# Altium PCB PCB1.PcbDoc
Units mil, origin at the board's own origin, x right, y up, seen from the top; angles counter-clockwise.
Board outline 4295 x 2660 mil, 4 copper layers (Top Layer, GND, VCC, Bottom Layer), stack 21.709 mil thick; 22 components, 16 nets, 77 pads, 13 vias.
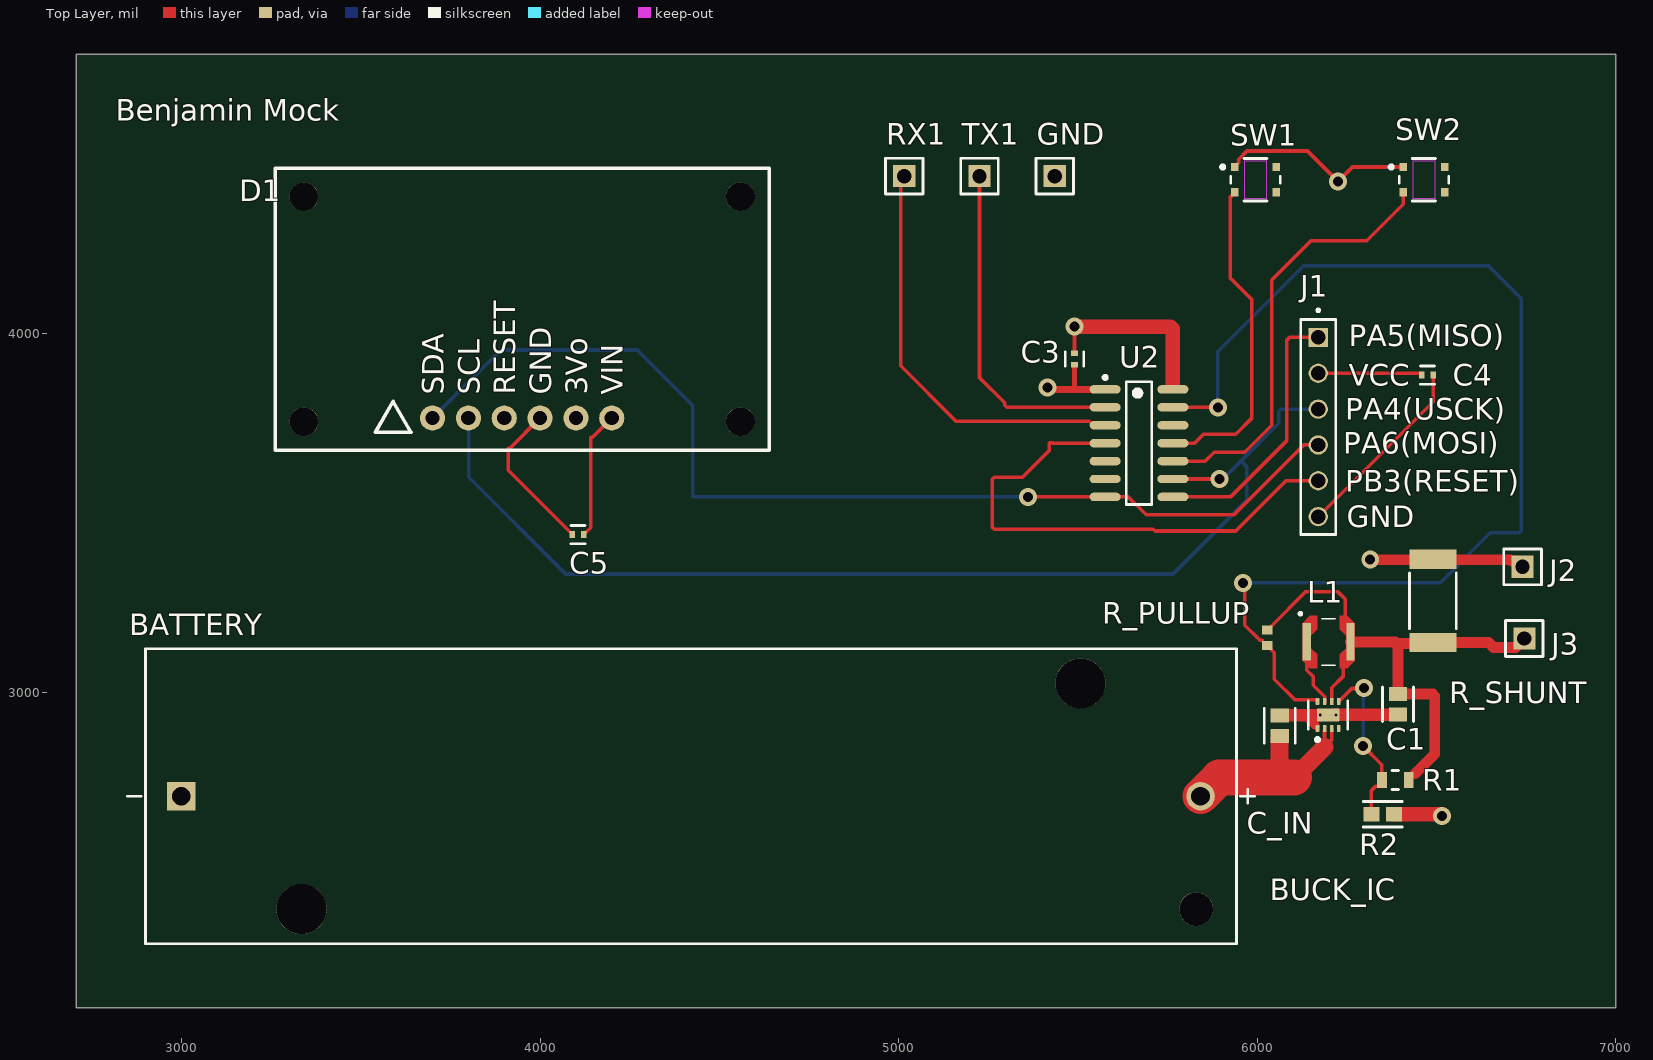
[diagram p0: Top Layer view]
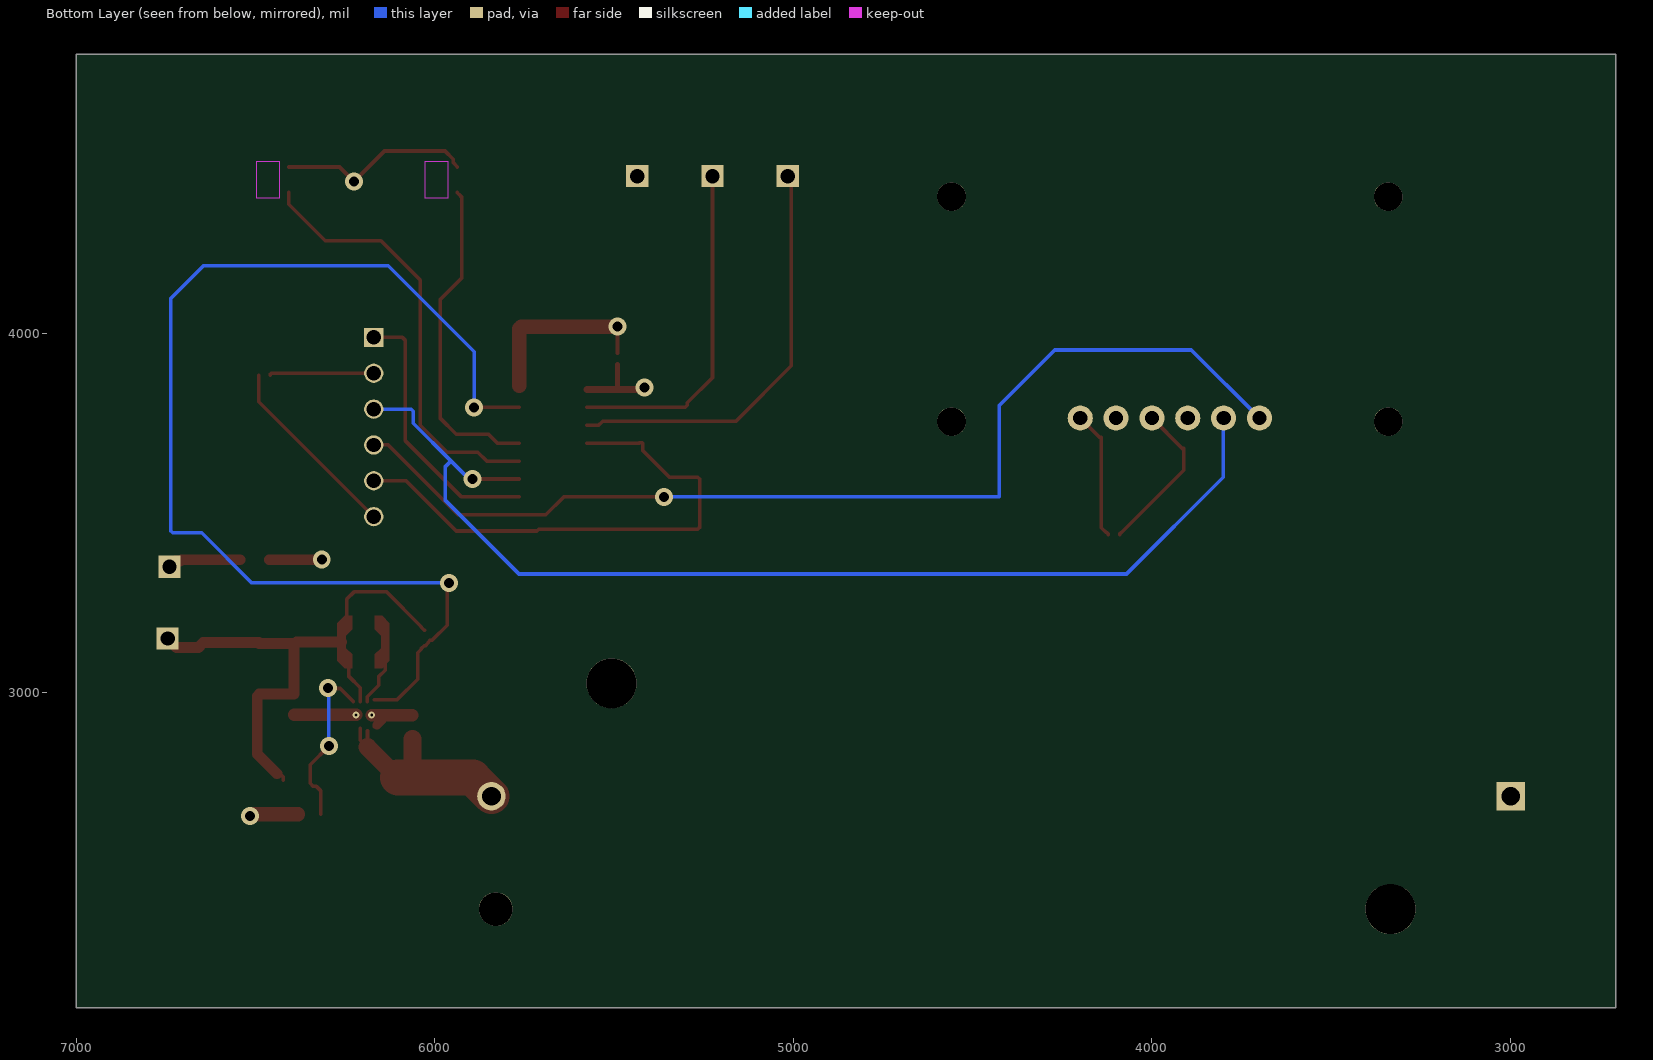
[diagram p1: Bottom Layer view, seen from below]
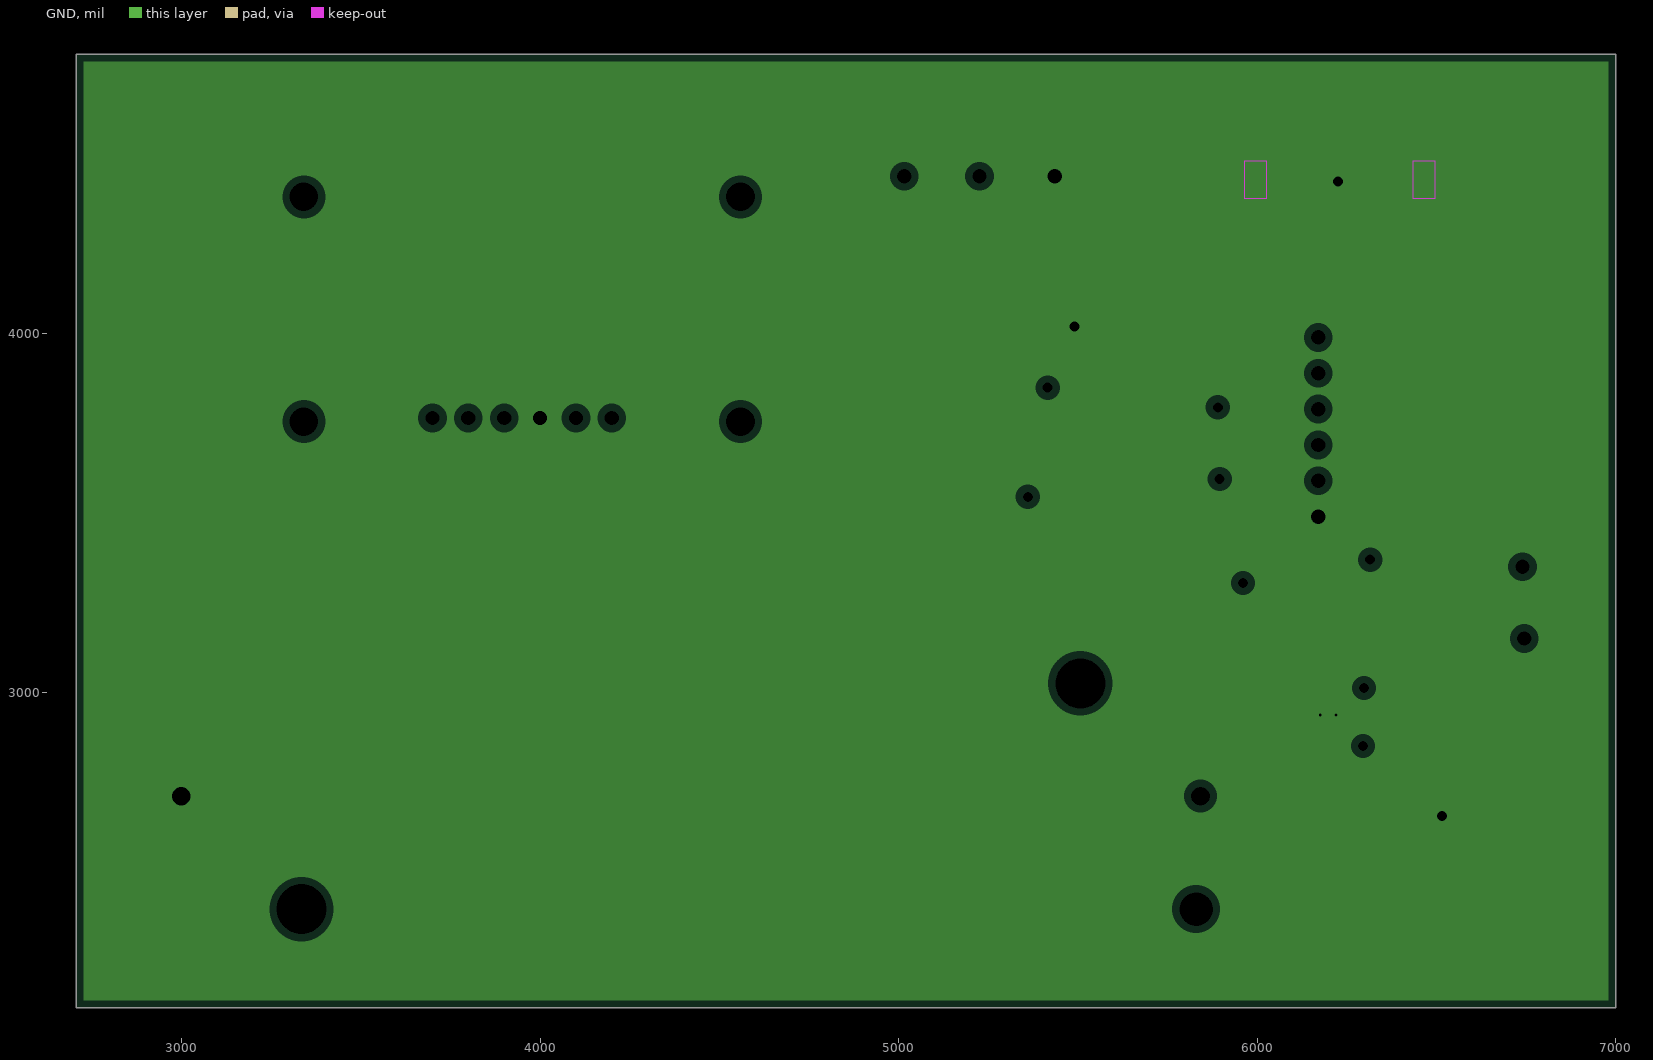
[diagram p2: GND, clearances drawn from the general rule]
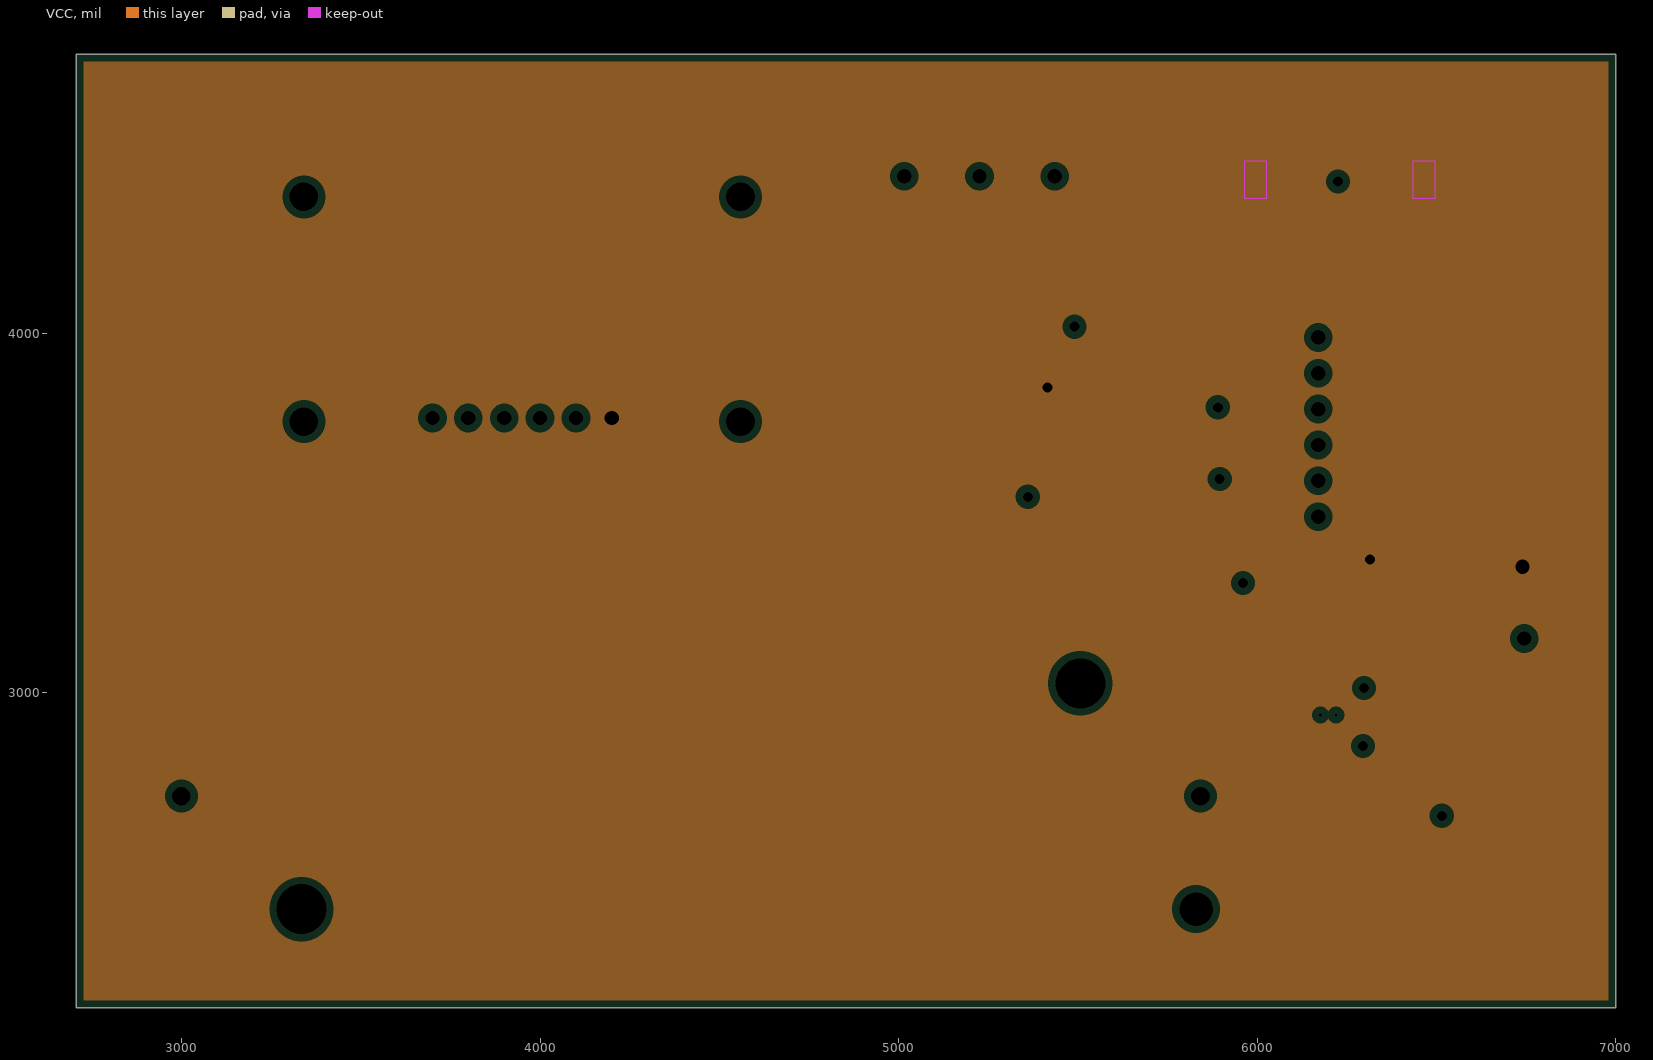
[diagram p3: VCC, clearances drawn from the general rule]
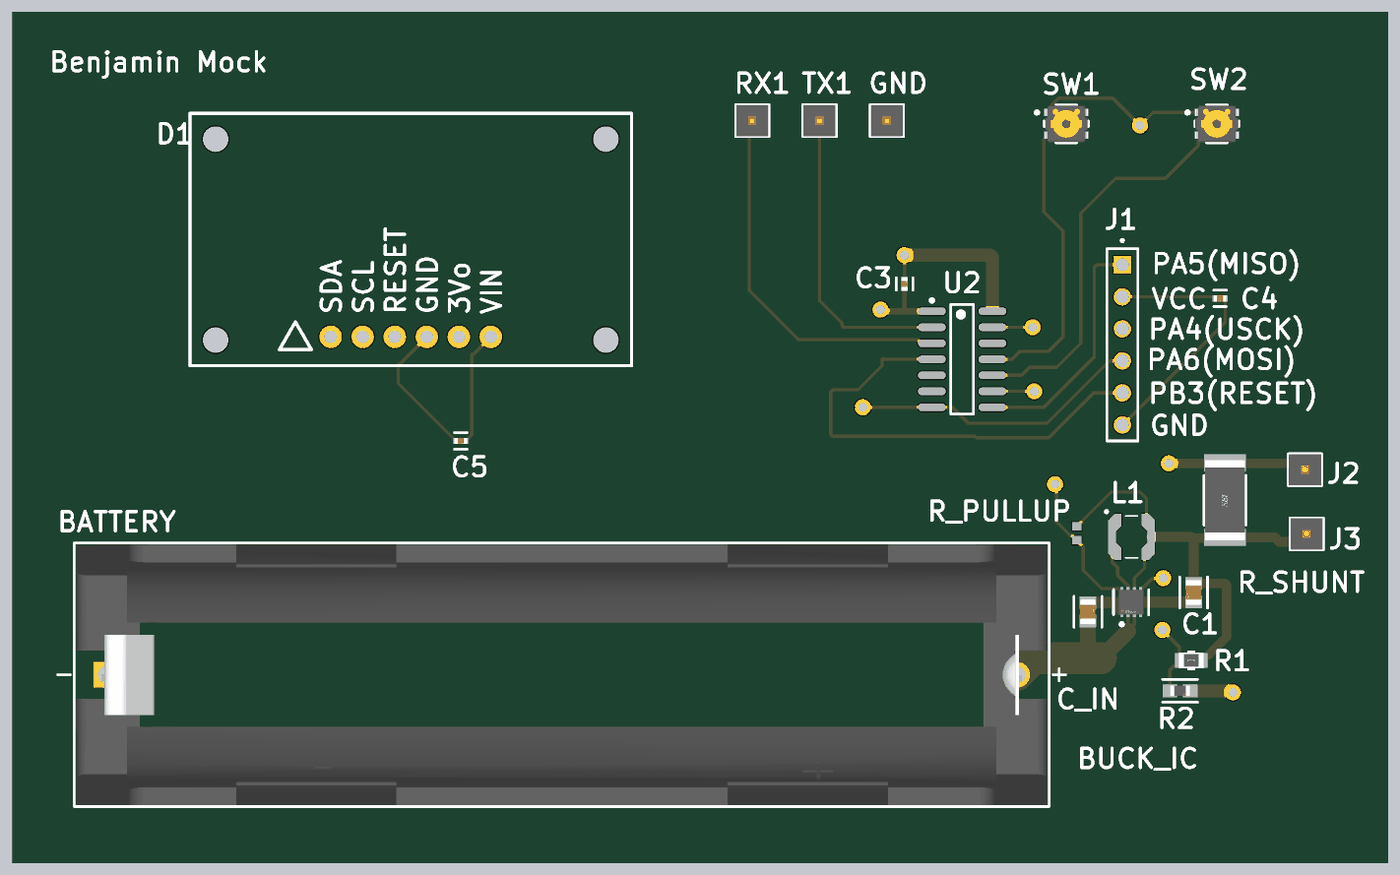
[diagram p4: 3D render of the assembled board from above, using the file's embedded part models]

## Layer stack, top to bottom
Top Solder: solder mask 0.4, Solder Resist, Dk 3.5
Top Layer: signal copper 1.4
Dielectric 2: prepreg 2.8, PP-006, Dk 4.1
GND: plane copper 0.3543, net GND
Dielectric 1: dielectric 12.6, FR-4, Dk 4.8
VCC: plane copper 0.3543, net VCC
Dielectric 3: prepreg 2.8, PP-006, Dk 4.1
Bottom Layer: signal copper 1.4
Bottom Solder: solder mask 0.4, Solder Resist, Dk 3.5

## Board outline
2705,2120 7000,2120 7000,4780 2705,4780

## Design rules (kind name [scope] priority, off if disabled: settings)
Clearance [All] p1: gap=10 ignorepadtopadclearanceinfootprint=TRUE except(8: Arc-Arc Arc-Track Arc-SMDPad Track-Track Track-SMDPad)
HoleSize [All] p1: absolutevalues=TRUE maxlimit=200 minlimit=1 maxpercent=80.000 minpercent=20.000
MinimumSolderMaskSliver [All] p1: minsoldermaskwidth=8
PlaneClearance [All] p1: clearance=20
PlaneConnect [All] p1: planeconnectstyle=Relief reliefexpansion=20 reliefentries=4 reliefconductorwidth=10 reliefairgap=10
PolygonConnect [All] p1: connectstyle=Relief reliefconductorwidth=10 reliefentries=4 polygonreliefangle="90 Angle" airgapwidth=10
RoutingVias [All] p1: holewidth=28 width=50 viastyle="Through Hole" minholewidth=28 minwidth=50 maxholewidth=28 maxwidth=50
SilkToSilkClearance [All] p1: silktosilkclearance=7.5
SilkToSolderMaskClearance [IsPad] p1: minsilkscreentomaskgap=7.5 clearancetoexposedcopper=TRUE
SolderMaskExpansion [All] p1: expansion=4 istentingtop=FALSE
SupplyNets "Schematic Supply Nets" [InNet('GND')] p1: voltage=0.000
Width [All] p1: maxlimit=100 minlimit=10 preferedwidth=10 bottomlayer_maxwidth=10 minimp=50.000000 maximp=50.000000 favimp=50.000000
24 further rules are at their usual default settings.

## Classes and differential pairs
component class U_BuckConverter: BATTERY BUCK_IC C1 C_IN L1 R1 R2 R_PULLUP
component class main: C3 C4 C5 D1 GND J1 J2 J3 R_SHUNT RX1 SW1 SW2 TX1 U2

## Components (designator, comment, footprint, x,y, rotation, side; value= is the part's Value field where it differs from the comment)
BATTERY "1043P" FP-1043P-MFG 4420,2710 r0 top
BUCK_IC "TPS62125DSGR" FP-DSG0008A-MFG 6197.5,2936.77 r90 top
C1 "GRM21BR61E106MA73K" FP-GRM21B-0_15-IPC_C 6392.5,2966.77 r270 top
C3 "GRM155C71H104KE19D" FP-GRM155-0_05-MFG 5490,3930 r90 top
C4 "GRM155C71H104KE19D" FP-GRM155-0_05-MFG 6475,3885 r0 top
C5 "GRM155C71H104KE19D" FP-GRM155-0_05-MFG 4105,3440 r0 top
C_IN "GRM21BR61E106MA73K" FP-GRM21B-0_15-IPC_C 6062.5,2906.77 r90 top
D1 "OLED_0.91in_6PIN" PCBComponent_1 3260,3675 r0 top
GND "HTSW-101-07-L-S" FP-HTSW-101-07-L-S-MFG 5435,4440 r0 top
J1 "TLW-106-05-T-S" SAMTEC_TLW-106-05-T-S 6170,3990 r90 top
J2 "HTSW-101-07-L-S" FP-HTSW-101-07-L-S-MFG 6740,3350 r0 top
J3 "HTSW-101-07-L-S" FP-HTSW-101-07-L-S-MFG 6745,3150 r0 top
L1 "LPS3314-222MRB" IND_LPS3314-222MRB 6198.99,3140.42 r0 top
R1 "MCR10EZPF1804" FP-MCR10-MFG 6385,2755 r0 top
R2 "TFCR0603-10W-E-5763BT-1K" FP-TFCR0603-IPC_A 6350,2660 r180 top
R_PULLUP "8K2 5% 0402(1005)" RESC0402(1005)_M 6027.5,3151.77 r90 top value="8200.00 Ohm"
R_SHUNT "CSRN2512FT50L0" FP-CSRN2512-IPC_B 6490,3255 r90 top
RX1 "HTSW-101-07-L-S" FP-HTSW-101-07-L-S-MFG 5015,4440 r0 top
SW1 "EVP-AYG0BA" FP-EVP-AYG0BA-MFG 5995,4430 r0 top
SW2 "EVP-AYG0BA" FP-EVP-AYG0BA-MFG 6465,4430 r0 top
TX1 "HTSW-101-07-L-S" FP-HTSW-101-07-L-S-MFG 5225,4440 r0 top
U2 "ATtiny84-20SSU" 14S1_N 5670,3695 r0 top

## Footprints (in the part's own frame and the unit in brackets; to place one, negate y for a bottom-side part, rotate by r counter-clockwise, add the part's x,y. Pads: shape width x height; smd on the part's side, far side on the other; paste and mask are expansions set on the pad)
14S1_N [mm] "SOIC, 14-Leads, Body 8.7x3.9mm, Pitch 1.27mm, IPC Medium Density"
  oval 2.2x0.6 smd: 1(-2.4,3.81) 2(-2.4,2.54) 3(-2.4,1.27) 4(-2.4,0) 5(-2.4,-1.27) 6(-2.4,-2.54) 7(-2.4,-3.81) 8(2.4,-3.81) 9(2.4,-2.54) 10(2.4,-1.27) 11(2.4,0) 12(2.4,1.27) 13(2.4,2.54) 14(2.4,3.81)
  silkscreen extent -2.52,-4.35 0.9,4.78, body extent -1.99,-4.37 1.99,4.37, height 1.75
FP-1043P-MFG [mm]
  rect 2.02x2.02 hole 1.32 paste-2539.97 mask+0: 1(-36.11,0)
  round 2.02 hole 1.32 paste-2539.97 mask+0: 2(36.11,0)
  round 3.55 hole 3.55 unplated paste-2539.97 mask+0: ""(-27.6,-8) ""(27.6,8)
  round 2.39 hole 2.39 unplated paste-2539.97 mask+0: ""(35.8,-8)
  silkscreen extent -39.95,-10.45 39.95,10.45, body extent -38.75,-10.55 38.75,10.55, height 0.25
FP-CSRN2512-IPC_B [mil]
  rect 53.33x130.24 smd paste+0 mask+0: 1(-116.17,0) 2(116.17,0)
  silkscreen extent -78,-65 78,65, body extent -153,-75 153,75, height 10
FP-DSG0008A-MFG [mm]
  rrect40% 0.5x0.25 smd paste+0 mask+0: 1(-0.95,0.75) 2(-0.95,0.25) 3(-0.95,-0.25) 4(-0.95,-0.75) 5(0.95,-0.75) 6(0.95,-0.25) 7(0.95,0.25) 8(0.95,0.75)
  rrect11% 0.9x1.6 smd paste-1000 mask+0: 9(0,0)
  silkscreen extent -1.87,-1.39 1,1.4, body extent -1.3,-1.15 1.3,1.15, height 0.25
FP-EVP-AYG0BA-MFG [mm]
  rect 0.55x0.6 smd paste+0 mask+0: A(-1.475,0.9) A'(1.475,0.9) B(-1.475,-0.9) B'(1.475,-0.9)
  Keep-Out Layer region: -0.8,-1.3 0.8,-1.3 0.8,1.3 -0.8,1.3
  silkscreen extent -2.45,-1.5 1.75,1.5, body extent -1.85,-1.6 1.85,1.6, height 0.25
FP-GRM21B-0_15-IPC_C [mil]
  rect 39.6x51.5 smd paste+0 mask+0: 1(-28.59,0) 2(28.59,0)
  silkscreen extent -48,-43 48,43, body extent -52,-31 52,31, height 10
FP-GRM155-0_05-MFG [mm]
  rect 0.4x0.5 smd paste+0 mask+0: 1(-0.4,0) 2(0.4,0)
  silkscreen extent -0.5,-0.65 0.5,0.65, body extent -0.7,-0.38 0.7,0.38, height 0.25
FP-HTSW-101-07-L-S-MFG [mm]
  rect 1.57x1.57 hole 1.02 paste-2539.97 mask+0: 1(0,0)
  silkscreen extent -1.33,-1.27 1.33,1.27, body extent -1.43,-1.37 1.43,1.37, height 0.25
FP-MCR10-MFG [mm]
  rect 0.7x1.15 smd paste+0 mask+0: 1(-0.95,0) 2(0.95,0)
  silkscreen extent -0.23,-0.67 0.23,0.67, body extent -1.4,-0.77 1.4,0.77, height 0.25
FP-TFCR0603-IPC_A [mil]
  rect 45.6x39.85 smd paste+0 mask+0: 1(-31.57,0) 2(31.57,0)
  silkscreen extent -54,-36 54,36, body extent -74,-40 74,40, height 10
IND_LPS3314-222MRB [mm]
  rect 0.6x2.65 smd paste-2 mask+0: 1(-1.55,0) 2(1.55,0)
  Top Layer region: -0.8,0.885 -1.25,0.44 -1.25,-0.44 -0.8,-0.885 -0.8,-1.85 -1.325,-1.85 -1.85,-1.325 -1.85,1.325 -1.325,1.85 -0.8,1.85
  Top Layer region: 1.85,1.325 1.85,-1.325 1.325,-1.85 0.8,-1.85 0.8,-0.885 1.25,-0.44 1.25,0.44 0.8,0.885 0.8,1.85 1.325,1.85
  silkscreen extent -2.1,-1.65 0.47,2.1
PCBComponent_1 [mil]
  round 70 hole 40: 1(439,90) 2(539,90) 3(639,90) 4(739,90) 5(839,90) 6(939,90)
  round 80 hole 80 unplated: 7(80,707.4) 7(1298,80) 8(80,80) 9(1298,707.4)
  silkscreen extent 0,0 1378,787
RESC0402(1005)_M [mm] "Chip Resistor, Body 1.0x0.5mm, IPC Low Density"
  rect 0.65x0.75 smd: 1(-0.55,0) 2(0.55,0)
  body extent -0.52,-0.28 0.53,0.28, height 0.4
SAMTEC_TLW-106-05-T-S [mm]
  rect 1.37x1.37 hole 1.02: 01(0,0)
  round 1.37 hole 1.02: 02(-2.54,0) 03(-5.08,0) 04(-7.62,0) 05(-10.16,0) 06(-12.7,0)
  silkscreen extent -13.97,-1.24 2.02,1.24

## Part data
BATTERY: library part CMP-19636-000034-1, "BATT HOLDER 18650 1 CELL PC PIN", Max Operating Temperature=145°C, Min Operating Temperature=-50°C, Package Quantity=50, Mount="Through Hole", Number of Cells=1, Packaging=Tray, Series=-, Termination="PC Pin"
BUCK_IC: library part CMP-04918-000040-2, "IC REG BUCK ADJ 300MA 8WSON", Max Input Voltage=17V, Max Operating Temperature=85°C, Max Output Current=300mA, Max Output Voltage=10V, Min Input Voltage=3V, Min Operating Temperature=-40°C, Min Output Voltage=1.2V, Package Quantity=3000, Quiescent Current=13uA, Switching Frequency=1MHz, Contact Plating=Gold, Lead Free="Lead Free", Mount="Surface Mount", Number of Outputs=1, Number of Pins=8, Output Configuration=Positive, Output Current=300mA, Output Type=Adjustable, Output Voltage=10V, Packaging="Tape and Reel", Radiation Hardening=No, Synchronous Rectifier=Yes
C1 C_IN: library part CMP-06035-045114-1, "Chip Multilayer Ceramic Capacitors for General Purpose, 0805, 10uF, X5R, 15%, 20%, 25V"
C3 C4 C5: library part CMP-06035-019038-1, "Chip Multilayer Ceramic Capacitors for General Purpose, 0402, 0.10uF, X7S, 22%, 10%, 50V", Capacitance=100nF, Dielectric=X7S, Tolerance=10%, Voltage Rating (DC)=50V, Length=1mm, Thickness=500um, Width=500um
GND J2 J3 RX1 TX1: library part CMP-02766-001464-1, "CONN HEADER VERT 1POS", Housing Color=Natural, Max Current Rating=7.6A, Max Operating Temperature=125°C, Max Voltage Rating (AC)=550V, Min Operating Temperature=-55°C, Contact Material=Bronze, Contact Plating=Gold, Depth=2.48mm, Gender=Male, Housing Material=Polymer, Length=2.54mm, Number of Contacts=1, Number of Rows=1, Orientation=Straight, Packaging=Bulk, Radiation Hardening=No, REACH SVHC="No SVHC", RoHS Compliant=Yes, Termination=Solder
J1: Package=None, Availability=Unavailable, MP=TLW-106-05-T-S, Price=None
L1: "Inductor, Shld, 2.2uh, 20%, 1.2a, Smd", Package=None, Check_prices=https://www.snapeda.com/parts/LPS3314-222MRB/Coilcraft/view-part/?ref=eda, MF=Coilcraft, MP=LPS3314-222MRB, SnapEDA_Link=https://www.snapeda.com/parts/LPS3314-222MRB/Coilcraft/view-part/?ref=snap
R1: library part CMP-08839-014638-1, "Thick Film Chip Resistor, 0805, 1.8MΩ, 1%, 100ppm/°C, 0.125W, 150V", Case Code (Imperial)=0805, Case Code (Metric)=2012, Max Operating Temperature=155°C, Max Power Dissipation=125mW, Min Operating Temperature=-55°C, Package Quantity=1, Resistance=1.8MR, Resistor Type="Thick Film", Temperature Coefficient=100ppm/°C, Tolerance=1%, Voltage Rating (DC)=150V, Case/Package=0805, Features="Automotive AEC-Q200", Height=0.024inch, Lead Free="Lead Free", Length=0.079inch, Mount="Surface Mount", Number of Terminations=2, Packaging="Tape and Reel", Power Rating=125mW, RoHS Compliant=Yes, Series=MCR10, Size Code=0805, Width=0.049inch
R2: library part CMP-250906-142061-1, "RES Thin Film,  576kΩ, 0.1%, 0.1W, 25ppm/°C, 0603"
R_PULLUP: library part CMP-1011-00096-1, "8K2 0.063W 5% 0402 (1005 Metric)  SMD", Case-EIA=0402, Case-Metric=1005, Power="0.063 W", Tolerance="5 %", Technology=SMT
R_SHUNT: library part CMP-26527-002421-1, "Res Thick Film 2512 50mΩ 1% 2W ±200ppm/°C Molded SMD Plastic T/R", Case/Package=2512, Max Operating Temperature=155°C, Max Power Dissipation=2W, Min Operating Temperature=-55°C, Package Quantity=4000, Resistance=50mR, Resistor Type="Thick Film", Temperature Coefficient=200ppm/°C, Tolerance=1%, Height=0.028inch, Length=0.25inch, Mount="Surface Mount", Number of Terminations=2, Packaging="Tape and Reel", Series=CSRN, Width=0.124inch
SW1 SW2: library part CMP-05618-000108-1, "SWITCH TACTILE SPST-NO 0.02A 15V", Max Operating Temperature=85°C, Min Operating Temperature=-40°C, Operating Force=240gf, Actuator Type=Standard, Illumination Type=Non-Illuminated, Mechanical Life=500000Cycles, Mount="Surface Mount", Packaging="Tape and Reel", Switch Function=Off-Mom, Switch Travel=0.15mm, Throw Configuration=SPST
U2: library part CMP-0093-00133-2, "8-bit AVR Microcontroller, 20MHz, 2.7-5.5V, 8KB Flash, 512 Bytes EEPROM, 512 Bytes SRAM, 14-pin SOIC, Industrial Grade (-40°C to 85°C), Pb-Free", Code_IPC=SOIC127P600-14, Code_JEDEC=MS-012-AB, ComponentLink1Description="Manufacturer URL", ComponentLink1URL=http://www.atmel.com/, ComponentLink2Description="ATtiny24/44/84 Datasheet", ComponentLink2URL=http://www.atmel.com/dyn/resources/prod_documents/doc8006.pdf, ComponentLink3Description="ATtiny24/44/84 Summary", ComponentLink3URL=http://www.atmel.com/dyn/resources/prod_documents/8006S.pdf, DatasheetVersion="revK, Oct-2010", PackageDescription="14-Lead, 0.150â€ Wide Body, Plastic Gull Wing Small Outline Package (SOIC)", PackageReference=14S1, PackageVersion="revA, Feb-2002", RevisionNote="DatasheetVersion updated. URLs added."

## Via types
v1: diameter 50, hole 28, Top Layer to Bottom Layer, 11 vias
v2: diameter 19.68, hole 7.87, Top Layer to Bottom Layer, 2 vias

## Nets (pads, with @x,y where several pads share a name; then routed paths per layer and width w, separated by ;. In a path a pad name is that pad's centre, name@x,y a point inside that pad or via, vN(x,y) a via of type N, cw(c..) or ccw(c..) an arc to the next point about the centre after c; other vN are vias at no path point)
GND: BATTERY.1 BUCK_IC.1 BUCK_IC.9 C1.2 C3.2 C4.2 C5.1 C_IN.2 D1.4 GND.1 J1.06 R2.1 SW1.A SW2.A U2.14 | length 2502.6
  Top Layer w10: D1.4 3914,3680 3910,3680 3910,3619.25 4084.41,3444.84 4086.38,3444.84 4089.25,3441.97 C5.1 ; C3.2 v1(5490,4020) ; 5758.63,4020 5764.49,4014.14 ; SW1.A 5936.93,4466.42 5948.5,4477.99 5948.5,4487.39 5971.11,4510 6140,4510 v1(6225,4425) 6265.43,4465.43 SW2.A ; 6145.15,2924.84 6145.15,2935.36 ; 6160.93,2909.05 6163.29,2909.05 BUCK_IC.1@6167.97,2904.37 ; J1.06 6490.75,3810.75 C4.2 ; C1.2@6380,2925.68 C1.2@6391.09,2936.77 ; v1@6510,2660 v1(6515,2655)
  Top Layer w25: 6145.15,2924.84 6160.93,2909.05
  Top Layer w35: C_IN.2 6145.15,2935.36 BUCK_IC.9@6175.85,2935.36 ; v2(6219.15,2936.77) C1.2@6391.09,2936.77
  Top Layer w40: v1(5490,4020) 5758.63,4020 ; U2.14@5764.49,3855 5764.49,4014.14 ; R2.1 v1@6510,2660
  other v2: 6175.85,2936.77
NetBATTERY_2: BATTERY.2 BUCK_IC.2 BUCK_IC.3 C_IN.1 | length 640.1
  Top Layer w10: 6062.5,2801.77 6102.5,2761.77 ; BUCK_IC.2@6187.5,2892.56 6187.5,2846.77 6207.34,2866.61 BUCK_IC.3
  Top Layer w50: 6062.5,2795.77 C_IN.1@6062.5,2870.18 ; 6102.5,2761.77 6187.5,2846.77
  Top Layer w100: BATTERY.2 5893.43,2761.77 6102.5,2761.77
NetBUCK_IC_5: BUCK_IC.5 R1.1 R2.2 | length 477.9
  Top Layer w10: BUCK_IC.5 6263.36,3010.5 6296.23,3010.5 v1(6297.5,3011.77) ; v1(6295,2850) 6347.6,2797.4 R1.1 6347.6,2746.14 6338.82,2737.36 6329.96,2737.36 6318.43,2725.83 R2.2
  Bottom Layer w10: v1(6295,2850) 6295,3009.27 v1(6297.5,3011.77)
NetBUCK_IC_7: BUCK_IC.7 L1.1 | length 187.2
  Top Layer w10: L1.1 6137.96,3061.64 6155.67,3043.94 6155.67,3019.76 6187.97,2987.46 6187.97,2974.25 6187.81,2974.25 BUCK_IC.7 BUCK_IC.7
NetC4_1: C4.1 J1.02 | length 292.5
  Top Layer w10: J1.02 6450.52,3890 6450.68,3889.84 6456.38,3889.84 6459.25,3886.97 C4.1
NetD1_1: D1.1 J1.04 U2.7 | length 2970.4
  Top Layer w10: v1(5360,3545) 5640,3545 5690,3495 5935,3495 6130,3690 J1.04
  Bottom Layer w10: D1.1 3889,3955 4270,3955 4425,3800 4425,3545 v1(5360,3545)
NetD1_2: D1.2 J1.03 U2.9 | length 3154.8
  Top Layer w10: U2.9 v1(5895,3595)
  Bottom Layer w10: D1.2 3800,3764 3800,3600 4070,3330 5765,3330 5970,3535 5970,3630 5954.57,3645.43 ; v1(5895,3595) 5904.14,3595 5954.57,3645.43 ; J1.03 6065.86,3790 6060,3784.14 6060,3750.86 5954.57,3645.43
NetJ1_01: J1.01 U2.8 | length 753.9
  Top Layer w10: U2.8 5925,3545 6082.63,3702.63 6082.63,3982.63 6090,3990 J1.01
NetJ1_05: J1.05 U2.4 | length 1475.5
  Top Layer w10: U2.4 5430,3695 5429.14,3695.86 5420.86,3695.86 5420,3695 5420,3675 5345,3600 5265.86,3600 5260,3594.14 5260,3460.86 5265.86,3455 5710,3455 5715,3450 5940,3450 6080,3590 J1.05
NetRX1_1: RX1.1 U2.3 | length 1172.5
  Top Layer w10: RX1.1 5005,4430 5005,3910.87 5159.37,3756.5 5531.35,3756.5 5542.84,3745 U2.3
NetSW1_B: SW1.B U2.11 | length 909
  Top Layer w10: U2.11 5825,3695 5850,3720 5940,3720 5985,3765 5985,4095 5925,4155 5925,4381.9 5930.86,4387.76 5931.1,4387.76 5936.93,4393.58 SW1.B
NetSW2_B: SW2.B U2.10 | length 1209.3
  Top Layer w10: U2.10 5855,3645 5880,3670 5965,3670 6040,3745 6040,4150 6150,4260 6305,4260 6406.93,4361.93 SW2.B
NetTX1_1: TX1.1 U2.2 | length 951.1
  Top Layer w10: TX1.1 5225,3877.87 5295,3807.87 5295,3800.86 5300.86,3795 U2.2
PG: BUCK_IC.8 R_PULLUP.1 U2.13 | length 3201.7
  Top Layer w10: U2.13 v1(5890,3795) ; v1(5960,3305) 5965,3300 5965,3187.15 6006.52,3145.63 6011.88,3145.63 6017.74,3139.77 6017.74,3137.91 6025.53,3130.12 R_PULLUP.1 ; R_PULLUP.1@6029.47,3130.12 6037.26,3122.32 6037.26,3120.35 6047.5,3110.12 6047.5,3036.77 6105.1,2979.17 BUCK_IC.8@6167.97,2979.17
  Bottom Layer w10: v1(5890,3795) 5890,3950 6130,4190 6645,4190 6736.91,4098.09 6736.91,3450.86 6731.05,3445 6650,3445 6510,3305 v1(5960,3305)
VCC: C3.1 C5.2 D1.6 J2.1 R_SHUNT.2 U2.1 | length 948.1
  Top Layer w10: C5.2 4120.75,3441.97 4123.62,3444.84 4125.59,3444.84 4140,3459.25 4140,3711 4145,3711 D1.6 ; 5490,3852.76 5497.76,3845
  Top Layer w15: 5490,3852.76 C3.1
  Top Layer w20: v1(5415,3850) 5420,3845 5497.76,3845 U2.1
  Top Layer w30: v1(6315,3370) R_SHUNT.2@6461.38,3370 ; R_SHUNT.2@6543.11,3370 6706.52,3370 6710.62,3365.91 6724.09,3365.91 J2.1
VOUT: BUCK_IC.6 C1.1 J3.1 L1.2 R1.2 R_PULLUP.2 R_SHUNT.1 | length 1547.8
  Top Layer w10: R_PULLUP.2 6029.47,3173.43 6037.26,3181.22 6037.26,3183.19 6134.07,3280 6225,3280 6245,3260 6245,3185 ; BUCK_IC.6 6207.97,2974.17 6207.97,3012.58 6239.33,3043.94 6239.33,3087.4 6245.19,3093.26 6253.2,3093.26 6260.01,3100.07 L1.2@6260.01,3130.91 ; L1.2@6251.71,3137.72 L1.2@6258.52,3130.91 ; C1.1 C1.1@6392.86,2995 ; R1.2 6422.4,2763.86 6431.18,2772.64 6440.04,2772.64 ; 6489.14,2995 6495,2989.14
  Top Layer w30: L1.2 6384.58,3140.42 ; 6388.75,3136.25 R_SHUNT.1@6490,3136.25 ; C1.1 6392.5,3132.5 ; C1.1@6392.86,2995 6489.14,2995 ; 6440.04,2772.64 6495,2827.6 6495,2989.14 ; R_SHUNT.1 6645.39,3138.83 6659.21,3125 6720,3125 J3.1
pads on no net: BATTERY. BUCK_IC.4 D1.3 D1.5 D1.7 D1.8 D1.9 SW1.A' SW1.B' SW2.A' SW2.B' U2.5 U2.6 U2.12

## Polygon pours and split planes (outlines as drawn)
GND on GND (split plane): 6979.9,2140.1 2725.1,2140.1 2725.1,4759.9 6979.9,4759.9
VCC on VCC (split plane): 6979.9,2140.1 2725.1,2140.1 2725.1,4759.9 6979.9,4759.9

## Silkscreen, mask and mechanical layers (free items; w line width, h text height)
Top Overlay:
  text "Benjamin Mock" at 2815,4594.99 h60
  text "PA5(MISO)" at 6255,3965 h60
  text "VCC" at 6255,3855 h60
  text "PA4(USCK)" at 6245,3760 h60
  text "PA6(MOSI)" at 6240,3665 h60
  text "PB3(RESET)" at 6245,3560 h60
  text "GND" at 6250,3460 h60

## Text inside footprints (layer, text, board x,y; h text height)
D1: Top Overlay "SDA" at 3730,3830 h60 r90; Top Overlay "SCL" at 3830,3830 h60 r90; Top Overlay "RESET" at 3930,3830 h60 r90; Top Overlay "GND" at 4030,3830 h60 r90; Top Overlay "VIN" at 4230,3830 h60 r90; Top Overlay "3Vo" at 4130,3830 h60 r90